# Altium PCB PCB1.PcbDoc (part 9 of 12)
Units mm, origin at the board's own origin, x right, y up, seen from the top; angles counter-clockwise.
Board outline 122.17 x 121.67 mm, 2 copper layers (Top Layer, Bottom Layer); 274 components, 225 nets, 941 pads, 421 vias.
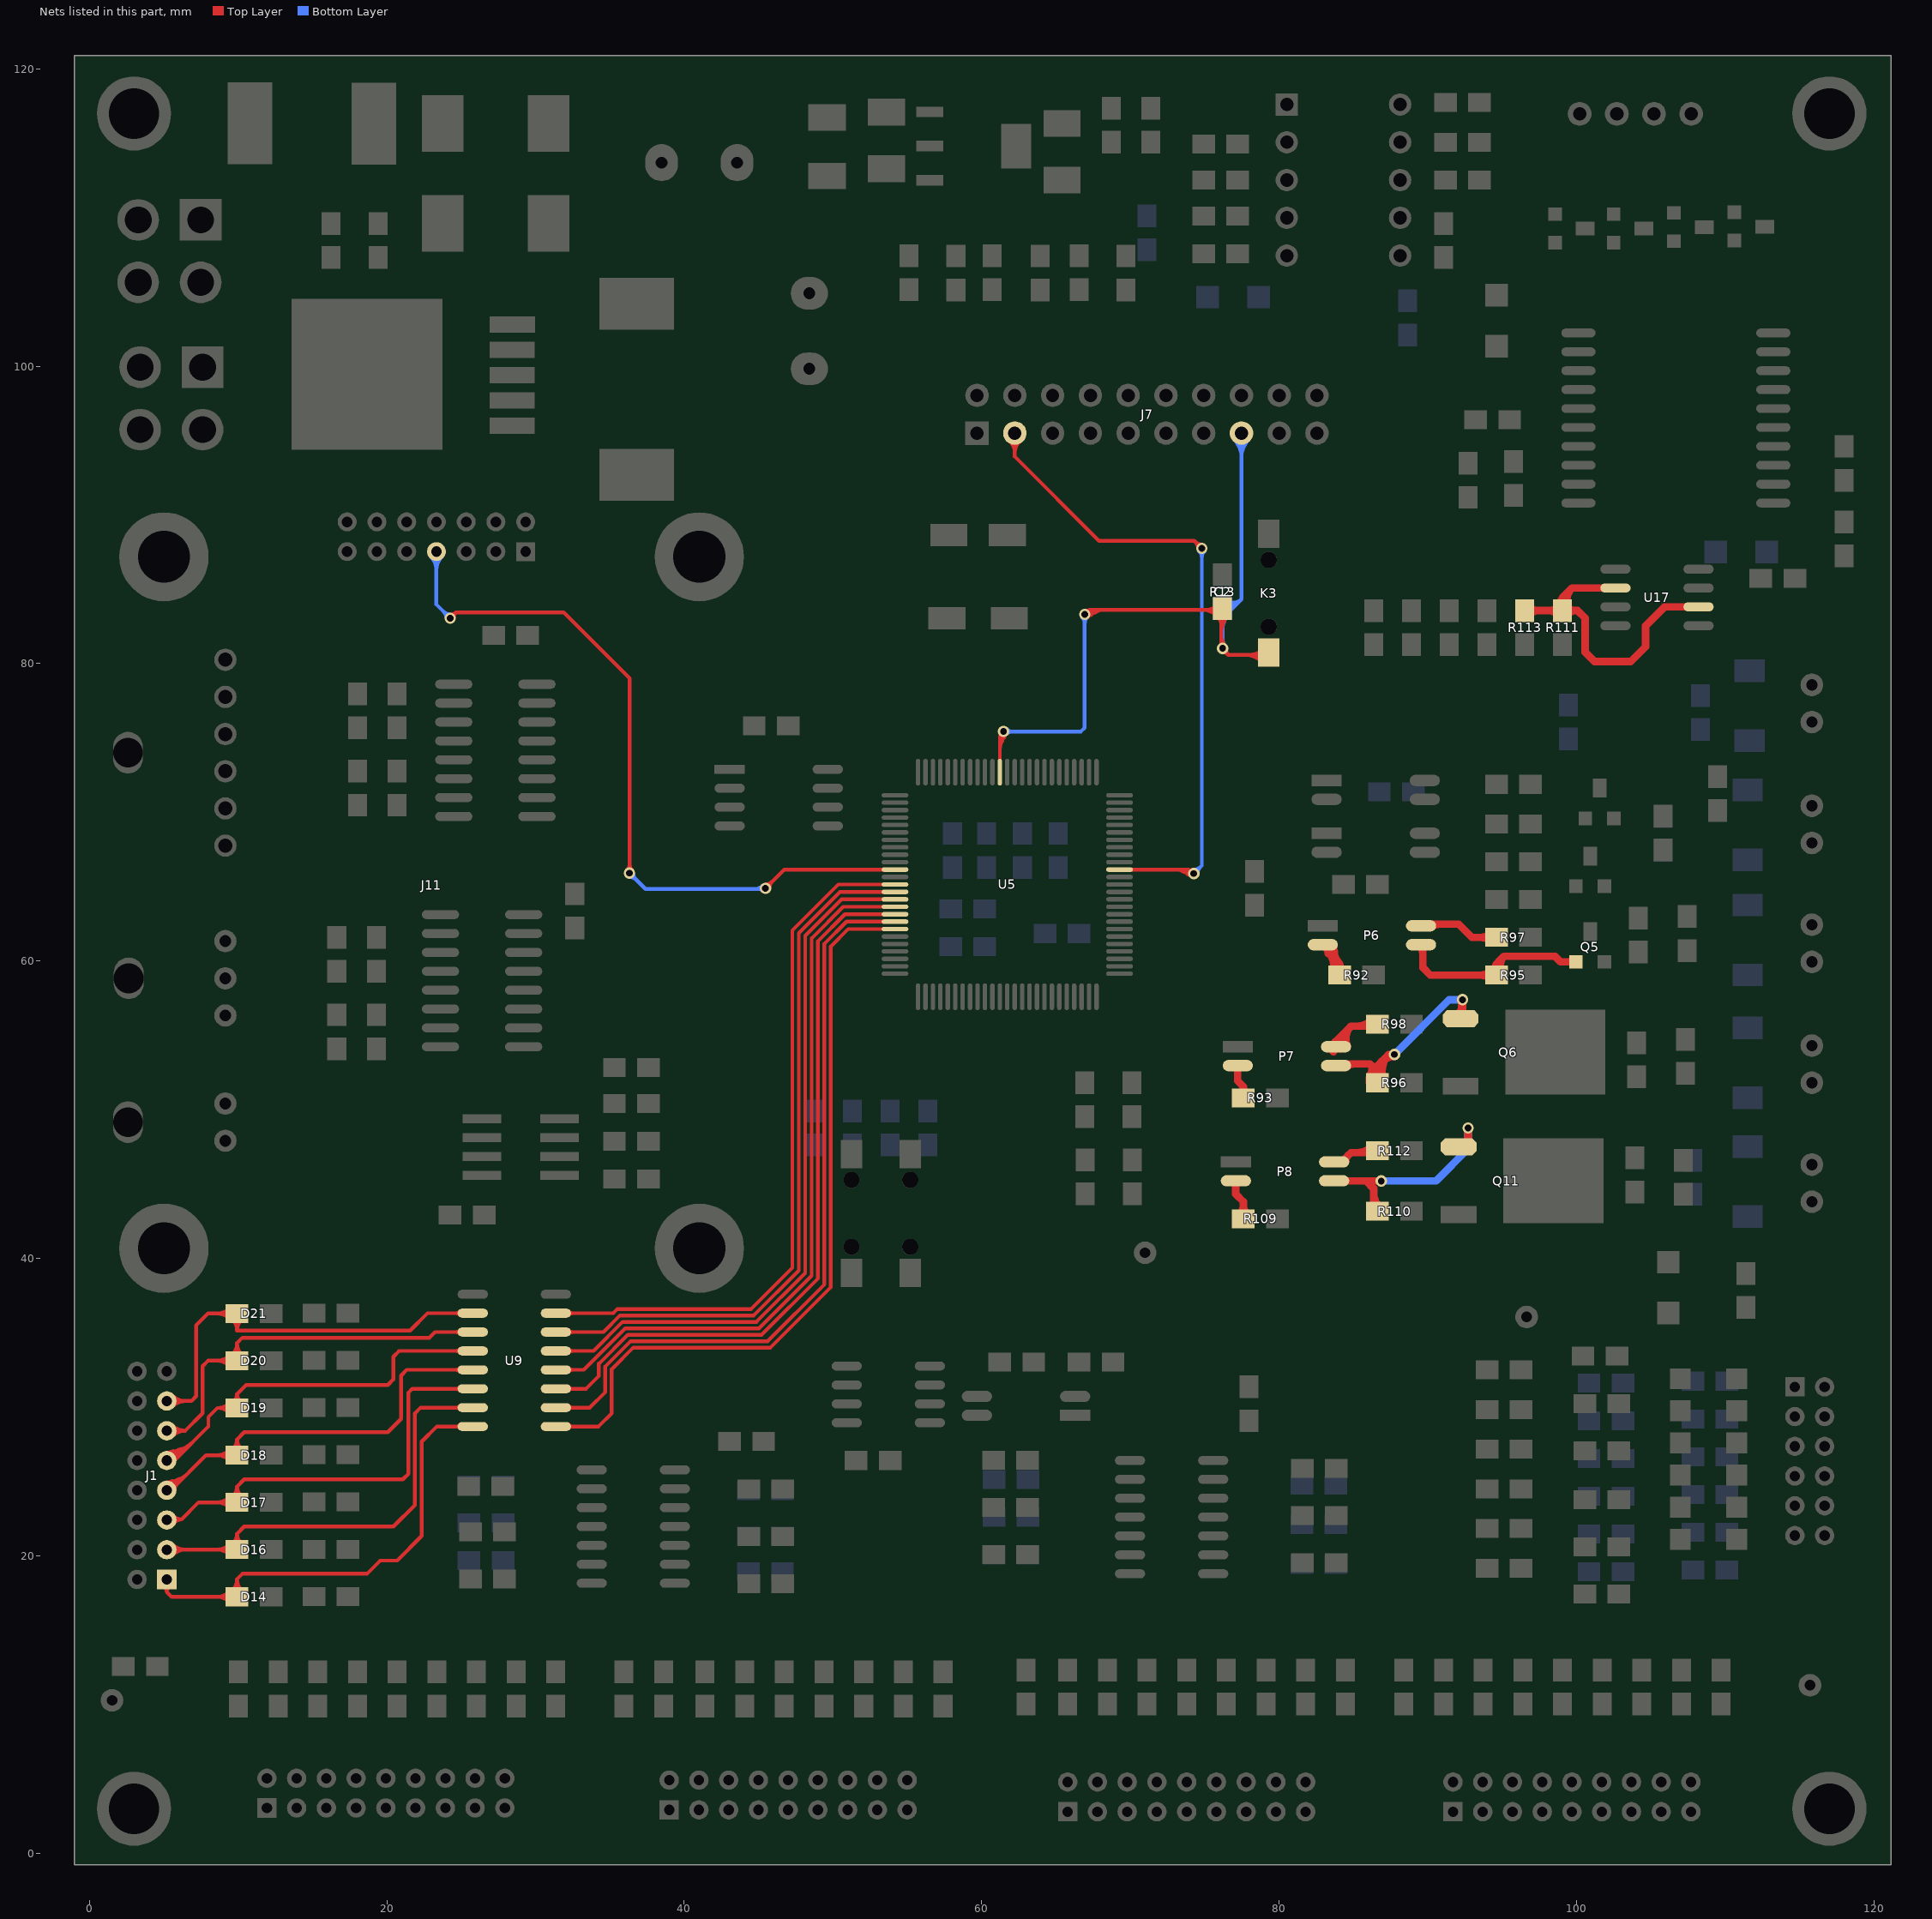
[diagram p9: the nets of this part, all layers, seen from the top]

## Via types
v1: diameter 0.762, hole 0.457, Top Layer to Bottom Layer, 339 vias
v2: diameter 1.27, hole 0.457, Top Layer to Bottom Layer, 39 vias
v3: diameter 0.889, hole 0.457, Top Layer to Bottom Layer, 21 vias
v4: diameter 1.27, hole 0.711, Top Layer to Bottom Layer, 12 vias
v5: diameter 1.524, hole 0.711, Top Layer to Bottom Layer, 5 vias
v6: diameter 1.016, hole 0.457, Top Layer to Bottom Layer, 3 vias
v7: diameter 0.711, hole 0.457, Top Layer to Bottom Layer, 1 vias
v8: diameter 1.524, hole 0.457, Top Layer to Bottom Layer, 1 vias

## Nets (pads, with @x,y where several pads share a name; then routed paths per layer and width w, separated by ;. In a path a pad name is that pad's centre, name@x,y a point inside that pad or via, vN(x,y) a via of type N, cw(c..) or ccw(c..) an arc to the next point about the centre after c; other vN are vias at no path point) (continued)
NetP6_2: P6.2 R92.1 | length 35.9
  Top Layer w0.508: P6.2@83.312,61.214 83.312,60.579 ; R92.1@84.074,59.055 84.074,59.817 ; P6.2@83.201,61.175 ccw(c83.946,61.021) 83.408,60.483 ; P6.2@83.201,61.175 ccw(c83.946,61.021) 83.408,60.483 ; P6.2@83.201,61.175 ccw(c83.946,61.021) 83.408,60.483 ; P6.2@83.201,61.175 ccw(c83.946,61.021) 83.408,60.483 ; 83.312,60.517 cw(c83.814,60.517) P6.2@83.622,60.98 ; 83.312,60.517 cw(c83.814,60.517) P6.2@83.622,60.98 ; 83.312,60.517 cw(c83.814,60.517) P6.2@83.622,60.98 ; 83.312,60.517 cw(c83.814,60.517) P6.2@83.622,60.98 ; 83.312,60.579 cw(c82.408,59.675) R92.1@83.594,59.197 ; 83.312,60.579 cw(c82.408,59.675) R92.1@83.594,59.197 ; 83.312,60.579 cw(c82.408,59.675) R92.1@83.594,59.197 ; 83.312,60.579 cw(c82.408,59.675) R92.1@83.594,59.197 ; 83.312,60.579 84.074,59.817 ; 83.331,60.589 cw(c83.966,60.419) P6.2@83.638,60.988 ; 83.331,60.589 cw(c83.966,60.419) P6.2@83.638,60.988 ; 83.331,60.589 cw(c83.966,60.419) P6.2@83.638,60.988 ; 83.331,60.589 cw(c83.966,60.419) P6.2@83.638,60.988 ; 83.331,60.589 cw(c83.966,60.419) P6.2@83.638,60.988 ; 83.331,60.589 cw(c83.966,60.419) P6.2@83.638,60.988 ; P6.2@83.406,60.717 ccw(c83.009,60.946) P6.2@83.451,61.065 ; P6.2@83.406,60.717 ccw(c83.009,60.946) P6.2@83.451,61.065 ; P6.2@83.406,60.717 ccw(c83.009,60.946) P6.2@83.451,61.065 ; P6.2@83.406,60.717 ccw(c83.009,60.946) P6.2@83.451,61.065 ; P6.2@83.49,61.003 cw(c83.007,60.461) 83.731,60.503 ; P6.2@83.49,61.003 cw(c83.007,60.461) 83.731,60.503 ; P6.2@83.49,61.003 cw(c83.007,60.461) 83.731,60.503 ; P6.2@83.49,61.003 cw(c83.007,60.461) 83.731,60.503 ; P6.2@83.49,61.003 cw(c83.007,60.461) 83.731,60.503 ; P6.2@83.49,61.003 cw(c83.007,60.461) 83.731,60.503 ; P6.2@83.698,61.072 ccw(c85.05,60.793) 84.074,59.817 ; P6.2@83.698,61.072 ccw(c85.05,60.793) 84.074,59.817 ; P6.2@83.698,61.072 ccw(c85.05,60.793) 84.074,59.817 ; P6.2@83.698,61.072 ccw(c85.05,60.793) 84.074,59.817 ; R92.1@83.845,59.36 ccw(c83.503,59.817) 84.074,59.817 ; R92.1@83.845,59.36 ccw(c83.503,59.817) 84.074,59.817 ; R92.1@83.845,59.36 ccw(c83.503,59.817) 84.074,59.817 ; R92.1@83.845,59.36 ccw(c83.503,59.817) 84.074,59.817 ; 83.855,60.036 cw(c83.183,59.363) R92.1@84.065,59.008 ; 83.855,60.036 cw(c83.183,59.363) R92.1@84.065,59.008 ; 83.855,60.036 cw(c83.183,59.363) R92.1@84.065,59.008 ; 83.855,60.036 cw(c83.183,59.363) R92.1@84.065,59.008 ; 84.074,59.817 ccw(c84.645,59.817) R92.1@84.303,59.36 ; 84.074,59.817 ccw(c84.645,59.817) R92.1@84.303,59.36 ; 84.074,59.817 ccw(c84.645,59.817) R92.1@84.303,59.36 ; 84.074,59.817 ccw(c84.645,59.817) R92.1@84.303,59.36
NetP6_3: P6.3 Q5.1 R95.1 | length 38.4
  Top Layer w0.508: P6.3@89.662,61.214 89.662,59.563 90.17,59.055 R95.1@94.615,59.055 ; R95.1@94.742,59.055 94.742,59.944 ; Q5.1@99.961,59.948 98.929,59.948 98.552,60.325 95.123,60.325 ; P6.3@89.453,61.008 cw(c88.949,60.504) 89.662,60.504 ; P6.3@89.453,61.008 cw(c88.949,60.504) 89.662,60.504 ; P6.3@89.453,61.008 cw(c88.949,60.504) 89.662,60.504 ; P6.3@89.453,61.008 cw(c88.949,60.504) 89.662,60.504 ; 93.568,59.055 cw(c93.568,58.135) R95.1@94.219,58.786 ; 93.568,59.055 ccw(c93.568,59.975) R95.1@94.219,59.324 ; 93.568,59.055 cw(c93.568,58.135) R95.1@94.219,58.786 ; 93.568,59.055 ccw(c93.568,59.975) R95.1@94.219,59.324 ; 93.568,59.055 cw(c93.568,58.135) R95.1@94.219,58.786 ; 93.568,59.055 ccw(c93.568,59.975) R95.1@94.219,59.324 ; 93.568,59.055 cw(c93.568,58.135) R95.1@94.219,58.786 ; 93.568,59.055 ccw(c93.568,59.975) R95.1@94.219,59.324 ; R95.1@94.479,59.331 ccw(c93.895,59.944) 94.742,59.944 ; R95.1@94.479,59.331 ccw(c93.895,59.944) 94.742,59.944 ; R95.1@94.479,59.331 ccw(c93.895,59.944) 94.742,59.944 ; R95.1@94.479,59.331 ccw(c93.895,59.944) 94.742,59.944 ; R95.1@94.64,58.979 cw(c95.212,59.405) 94.708,59.91 ; R95.1@94.64,58.979 cw(c95.212,59.405) 94.708,59.91 ; R95.1@94.64,58.979 cw(c95.212,59.405) 94.708,59.91 ; R95.1@94.64,58.979 cw(c95.212,59.405) 94.708,59.91 ; 94.742,59.944 ccw(c95.589,59.944) R95.1@95.005,59.331 ; 94.742,59.944 ccw(c95.589,59.944) R95.1@95.005,59.331 ; 94.742,59.944 ccw(c95.589,59.944) R95.1@95.005,59.331 ; 94.742,59.944 ccw(c95.589,59.944) R95.1@95.005,59.331 ; 94.742,59.944 95.123,60.325 ; R95.1@95.047,59.283 cw(c95.688,59.76) 95.123,60.325 ; R95.1@95.047,59.283 cw(c95.688,59.76) 95.123,60.325 ; R95.1@95.047,59.283 cw(c95.688,59.76) 95.123,60.325 ; R95.1@95.047,59.283 cw(c95.688,59.76) 95.123,60.325 ; 99.471,59.948 cw(c99.471,59.457) Q5.1@99.818,59.804 ; 99.471,59.948 ccw(c99.471,60.438) Q5.1@99.818,60.091 ; 99.471,59.948 cw(c99.471,59.457) Q5.1@99.818,59.804 ; 99.471,59.948 ccw(c99.471,60.438) Q5.1@99.818,60.091 ; 99.471,59.948 cw(c99.471,59.457) Q5.1@99.818,59.804 ; 99.471,59.948 ccw(c99.471,60.438) Q5.1@99.818,60.091 ; 99.471,59.948 cw(c99.471,59.457) Q5.1@99.818,59.804 ; 99.471,59.948 ccw(c99.471,60.438) Q5.1@99.818,60.091
NetP6_4: P6.4 R97.1 | length 13.3
  Top Layer w0.508: P6.4@89.662,62.484 92.075,62.484 92.964,61.595 R97.1@94.615,61.595 ; P6.4@90.268,62.278 cw(c90.765,61.781) 90.765,62.484 ; P6.4@90.268,62.278 cw(c90.765,61.781) 90.765,62.484 ; P6.4@90.268,62.278 cw(c90.765,61.781) 90.765,62.484 ; P6.4@90.268,62.278 cw(c90.765,61.781) 90.765,62.484 ; 93.568,61.595 cw(c93.568,60.675) R97.1@94.219,61.326 ; 93.568,61.595 ccw(c93.568,62.515) R97.1@94.219,61.864 ; 93.568,61.595 cw(c93.568,60.675) R97.1@94.219,61.326 ; 93.568,61.595 ccw(c93.568,62.515) R97.1@94.219,61.864 ; 93.568,61.595 cw(c93.568,60.675) R97.1@94.219,61.326 ; 93.568,61.595 ccw(c93.568,62.515) R97.1@94.219,61.864 ; 93.568,61.595 cw(c93.568,60.675) R97.1@94.219,61.326 ; 93.568,61.595 ccw(c93.568,62.515) R97.1@94.219,61.864
NetP7_2: P7.2 R93.1 | length 6.7
  Top Layer w0.508: P7.2@77.216,53.086 77.216,51.943 77.597,51.562 ; R93.1@77.597,50.8 77.597,51.562 ; R93.1@77.368,51.105 ccw(c77.026,51.562) 77.597,51.562 ; R93.1@77.368,51.105 ccw(c77.026,51.562) 77.597,51.562 ; R93.1@77.368,51.105 ccw(c77.026,51.562) 77.597,51.562 ; R93.1@77.368,51.105 ccw(c77.026,51.562) 77.597,51.562 ; 77.597,51.562 ccw(c78.168,51.562) R93.1@77.826,51.105 ; 77.597,51.562 ccw(c78.168,51.562) R93.1@77.826,51.105 ; 77.597,51.562 ccw(c78.168,51.562) R93.1@77.826,51.105 ; 77.597,51.562 ccw(c78.168,51.562) R93.1@77.826,51.105
NetP7_3: P7.3 Q6.1 R96.1 | length 58.9
  Top Layer w0.508: P7.3@83.566,53.086 86.106,53.086 86.233,52.959 ; R96.1@86.233,51.943 86.233,52.578 ; v1(87.757,53.721) v1@87.376,53.721 ; Q6.1@91.987,56.359 ccw(c91.162,57.184) v1@92.329,57.184 ; v1(92.329,57.404) 92.329,56.502 Q6.1@92.683,56.148 ; P7.3@84.553,52.88 cw(c85.05,52.383) 85.05,53.086 ; P7.3@84.553,52.88 cw(c85.05,52.383) 85.05,53.086 ; P7.3@84.553,52.88 cw(c85.05,52.383) 85.05,53.086 ; P7.3@84.553,52.88 cw(c85.05,52.383) 85.05,53.086 ; R96.1@86.17,51.538 cw(c87.093,51.987) 86.367,52.712 ; R96.1@86.17,51.538 cw(c87.093,51.987) 86.367,52.712 ; R96.1@86.17,51.538 cw(c87.093,51.987) 86.367,52.712 ; R96.1@86.17,51.538 cw(c87.093,51.987) 86.367,52.712 ; 86.233,52.578 ccw(c86.627,52.578) R96.1@86.556,52.191 ; 86.233,52.578 ccw(c86.627,52.578) R96.1@86.556,52.191 ; 86.233,52.578 ccw(c86.627,52.578) R96.1@86.556,52.191 ; 86.233,52.578 ccw(c86.627,52.578) R96.1@86.556,52.191 ; 86.233,52.578 ccw(c86.627,52.578) R96.1@86.556,52.191 ; 86.233,52.578 ccw(c86.627,52.578) R96.1@86.556,52.191 ; 86.233,52.578 ccw(c86.627,52.578) R96.1@86.556,52.191 ; 86.233,52.578 ccw(c86.627,52.578) R96.1@86.556,52.191 ; 86.233,52.578 86.233,52.959 ; 86.233,52.578 v1@87.376,53.721 ; 86.233,52.959 ccw(c87.198,52.959) R96.1@86.688,52.139 ; 86.233,52.959 ccw(c87.198,52.959) R96.1@86.688,52.139 ; 86.233,52.959 ccw(c87.198,52.959) R96.1@86.688,52.139 ; 86.233,52.959 ccw(c87.198,52.959) R96.1@86.688,52.139 ; R96.1@86.627,51.76 cw(c87.771,52.317) 86.872,53.217 ; R96.1@86.627,51.76 cw(c87.771,52.317) 86.872,53.217 ; R96.1@86.627,51.76 cw(c87.771,52.317) 86.872,53.217 ; R96.1@86.627,51.76 cw(c87.771,52.317) 86.872,53.217 ; 86.89,53.235 cw(c87.757,52.368) v1@87.757,53.594 ; 86.89,53.235 cw(c87.757,52.368) v1@87.757,53.594 ; 86.89,53.235 cw(c87.757,52.368) v1@87.757,53.594 ; 86.89,53.235 cw(c87.757,52.368) v1@87.757,53.594 ; R96.1@87.084,51.983 cw(c88.45,52.647) 87.376,53.721 ; R96.1@87.084,51.983 cw(c88.45,52.647) 87.376,53.721 ; R96.1@87.084,51.983 cw(c88.45,52.647) 87.376,53.721 ; R96.1@87.084,51.983 cw(c88.45,52.647) 87.376,53.721 ; 87.207,53.446 ccw(c87.019,54.147) v1@87.647,53.784 ; 87.207,53.446 ccw(c87.019,54.147) v1@87.647,53.784 ; 87.207,53.446 ccw(c87.019,54.147) v1@87.647,53.784 ; 87.207,53.446 ccw(c87.019,54.147) v1@87.647,53.784 ; 87.207,53.446 ccw(c87.019,54.147) v1@87.647,53.784 ; 87.207,53.446 ccw(c87.019,54.147) v1@87.647,53.784 ; 87.381,53.519 cw(c87.616,53.284) v1@87.718,53.6 ; 87.381,53.519 cw(c87.616,53.284) v1@87.718,53.6 ; 87.381,53.519 cw(c87.616,53.284) v1@87.718,53.6 ; 87.381,53.519 cw(c87.616,53.284) v1@87.718,53.6 ; Q6.1@91.977,56.359 ccw(c91.129,57.207) v1@92.329,57.207 ; Q6.1@91.977,56.359 ccw(c91.129,57.207) v1@92.329,57.207 ; Q6.1@91.977,56.359 ccw(c91.129,57.207) v1@92.329,57.207 ; v1@92.219,57.341 cw(c91.803,57.1) 92.267,56.976 ; v1@92.219,57.341 cw(c91.803,57.1) 92.267,56.976 ; v1@92.219,57.341 cw(c91.803,57.1) 92.267,56.976 ; v1@92.219,57.34 cw(c91.785,57.09) 92.269,56.96 ; v1@92.219,57.341 cw(c91.803,57.1) 92.267,56.976 ; v1@92.219,57.341 cw(c91.803,57.1) 92.267,56.976 ; v1@92.219,57.34 cw(c91.785,57.09) 92.269,56.96 ; v1@92.219,57.341 cw(c91.803,57.1) 92.267,56.976 ; v1@92.219,57.34 cw(c91.785,57.09) 92.269,56.96 ; v1@92.219,57.34 cw(c91.785,57.09) 92.269,56.96
  Bottom Layer w0.508: v1(87.757,53.721) 91.44,57.404 v1(92.329,57.404)
NetP7_4: P7.4 R98.1 | length 20.5
  Top Layer w0.508: P7.4@83.566,54.356 84.836,55.626 ; R98.1@86.233,55.626 84.836,55.626 ; P7.4@83.646,53.888 cw(c84.211,54.132) P7.4@83.776,54.566 ; P7.4@83.646,53.888 cw(c84.211,54.132) P7.4@83.776,54.566 ; P7.4@83.646,53.888 cw(c84.211,54.132) P7.4@83.776,54.566 ; P7.4@83.646,53.888 cw(c84.211,54.132) P7.4@83.776,54.566 ; P7.4@84.113,54.089 cw(c84.952,54.45) 84.306,55.096 ; P7.4@84.113,54.089 cw(c84.952,54.45) 84.306,55.096 ; P7.4@84.113,54.089 cw(c84.952,54.45) 84.306,55.096 ; P7.4@84.113,54.089 cw(c84.952,54.45) 84.306,55.096 ; P7.4@84.58,54.29 cw(c85.693,54.769) 84.836,55.626 ; P7.4@84.58,54.29 cw(c85.693,54.769) 84.836,55.626 ; P7.4@84.58,54.29 cw(c85.693,54.769) 84.836,55.626 ; P7.4@84.58,54.29 cw(c85.693,54.769) 84.836,55.626 ; 85.261,55.626 ccw(c85.261,56.979) R98.1@86.218,56.022 ; 85.261,55.626 ccw(c85.261,56.979) R98.1@86.218,56.022 ; 85.261,55.626 ccw(c85.261,56.979) R98.1@86.218,56.022 ; 85.261,55.626 ccw(c85.261,56.979) R98.1@86.218,56.022
NetP8_2: P8.2 R109.1 | length 8.5
  Top Layer w0.508: P8.2@77.089,45.212 77.089,44.323 77.597,43.815 R109.1@77.597,42.672 ; R109.1@77.328,42.941 ccw(c76.677,43.592) 77.597,43.592 ; R109.1@77.328,42.941 ccw(c76.677,43.592) 77.597,43.592 ; R109.1@77.328,42.941 ccw(c76.677,43.592) 77.597,43.592 ; R109.1@77.328,42.941 ccw(c76.677,43.592) 77.597,43.592 ; 77.597,43.592 ccw(c78.517,43.592) R109.1@77.866,42.941 ; 77.597,43.592 ccw(c78.517,43.592) R109.1@77.866,42.941 ; 77.597,43.592 ccw(c78.517,43.592) R109.1@77.866,42.941 ; 77.597,43.592 ccw(c78.517,43.592) R109.1@77.866,42.941
NetP8_3: P8.3 Q11.1 R110.1 | length 24.1
  Top Layer w0.508: P8.3@83.439,45.212 85.852,45.212 ; R110.1@86.36,43.18 86.36,44.704 85.852,45.212 ; v1(86.868,45.212) 85.852,45.212 ; Q11.1@92.495,47.723 ccw(c91.976,48.241) 92.71,48.241 ; Q11.1@92.683,47.512 92.71,47.539 v1(92.71,48.768) ; 92.71,48.288 ccw(c93.509,48.288) Q11.1@92.944,47.723 ; 86.36,44.406 ccw(c87.713,44.406) R110.1@86.756,43.449 ; 86.36,44.406 ccw(c87.713,44.406) R110.1@86.756,43.449 ; 86.36,44.406 ccw(c87.713,44.406) R110.1@86.756,43.449 ; 86.36,44.406 ccw(c87.713,44.406) R110.1@86.756,43.449 ; Q11.1@92.485,47.723 ccw(c91.943,48.265) 92.71,48.265 ; Q11.1@92.485,47.723 ccw(c91.943,48.265) 92.71,48.265 ; Q11.1@92.485,47.723 ccw(c91.943,48.265) 92.71,48.265 ; 92.71,48.265 ccw(c93.477,48.265) Q11.1@92.935,47.723 ; 92.71,48.265 ccw(c93.477,48.265) Q11.1@92.935,47.723 ; 92.71,48.265 ccw(c93.477,48.265) Q11.1@92.935,47.723
  Bottom Layer w0.508: v1(86.868,45.212) 90.551,45.212 92.71,47.371 v1(92.71,48.768)
NetP8_4: P8.4 R112.1 | length 9.2
  Top Layer w0.508: P8.4@83.439,46.482 84.201,46.482 84.836,47.117 R112.1@86.233,47.117 ; P8.4@84.463,46.493 cw(c85.069,46.493) 84.641,46.922 ; P8.4@84.463,46.493 cw(c85.069,46.493) 84.641,46.922 ; P8.4@84.463,46.493 cw(c85.069,46.493) 84.641,46.922 ; P8.4@84.463,46.493 cw(c85.069,46.493) 84.641,46.922 ; 85.261,47.117 ccw(c85.261,48.47) R112.1@86.218,47.513 ; 85.261,47.117 ccw(c85.261,48.47) R112.1@86.218,47.513 ; 85.261,47.117 ccw(c85.261,48.47) R112.1@86.218,47.513 ; 85.261,47.117 ccw(c85.261,48.47) R112.1@86.218,47.513
NetR111_1: R111.1 R113.2 U17.2 U17.6 | length 52.3
  Top Layer w0.508: R113.2@96.52,83.566 R111.1@99.06,83.566 ; U17.2@102.616,85.09 99.695,85.09 ; U17.6@108.204,83.82 105.918,83.82 104.648,82.55 104.648,81.153 103.632,80.137 101.219,80.137 100.584,80.772 100.584,83.058 100.076,83.566 R111.1@99.06,83.566 ; R113.2@96.789,83.297 cw(c97.44,82.646) 97.44,83.566 ; R113.2@96.789,83.297 cw(c97.44,82.646) 97.44,83.566 ; R113.2@96.789,83.297 cw(c97.44,82.646) 97.44,83.566 ; R113.2@96.789,83.297 cw(c97.44,82.646) 97.44,83.566 ; R113.2@96.789,83.835 ccw(c97.44,84.486) 97.44,83.566 ; R113.2@96.789,83.835 ccw(c97.44,84.486) 97.44,83.566 ; R113.2@96.789,83.835 ccw(c97.44,84.486) 97.44,83.566 ; R113.2@96.789,83.835 ccw(c97.44,84.486) 97.44,83.566 ; 98.14,83.566 cw(c98.14,82.646) R111.1@98.791,83.297 ; 98.14,83.566 ccw(c98.14,84.486) R111.1@98.791,83.835 ; 98.14,83.566 cw(c98.14,82.646) R111.1@98.791,83.297 ; 98.14,83.566 ccw(c98.14,84.486) R111.1@98.791,83.835 ; 98.14,83.566 cw(c98.14,82.646) R111.1@98.791,83.297 ; 98.14,83.566 ccw(c98.14,84.486) R111.1@98.791,83.835 ; 98.14,83.566 cw(c98.14,82.646) R111.1@98.791,83.297 ; 98.14,83.566 ccw(c98.14,84.486) R111.1@98.791,83.835 ; R111.1@98.831,83.998 ccw(c98.489,84.455) 99.06,84.455 ; R111.1@98.831,83.998 ccw(c98.489,84.455) 99.06,84.455 ; R111.1@98.831,83.998 ccw(c98.489,84.455) 99.06,84.455 ; R111.1@98.831,83.998 ccw(c98.489,84.455) 99.06,84.455 ; R111.1@98.941,83.649 cw(c99.725,83.938) 99.134,84.529 ; R111.1@98.941,83.649 cw(c99.725,83.938) 99.134,84.529 ; R111.1@98.941,83.649 cw(c99.725,83.938) 99.134,84.529 ; R111.1@98.941,83.649 cw(c99.725,83.938) 99.134,84.529 ; R111.1@99.06,83.566 99.06,84.455 ; 99.06,84.455 ccw(c99.631,84.455) R111.1@99.289,83.998 ; 99.06,84.455 ccw(c99.631,84.455) R111.1@99.289,83.998 ; 99.06,84.455 ccw(c99.631,84.455) R111.1@99.289,83.998 ; 99.06,84.455 ccw(c99.631,84.455) R111.1@99.289,83.998 ; 99.06,84.455 99.695,85.09 ; R111.1@99.329,83.297 cw(c99.98,82.646) 99.98,83.566 ; R111.1@99.329,83.297 cw(c99.98,82.646) 99.98,83.566 ; R111.1@99.329,83.297 cw(c99.98,82.646) 99.98,83.566 ; R111.1@99.329,83.297 cw(c99.98,82.646) 99.98,83.566 ; R111.1@99.329,83.835 ccw(c99.98,84.486) 99.98,83.566 ; R111.1@99.329,83.835 ccw(c99.98,84.486) 99.98,83.566 ; R111.1@99.329,83.835 ccw(c99.98,84.486) 99.98,83.566 ; R111.1@99.329,83.835 ccw(c99.98,84.486) 99.98,83.566 ; R111.1@99.417,83.825 cw(c100.544,84.241) 99.695,85.09 ; R111.1@99.417,83.825 cw(c100.544,84.241) 99.695,85.09 ; R111.1@99.417,83.825 cw(c100.544,84.241) 99.695,85.09 ; R111.1@99.417,83.825 cw(c100.544,84.241) 99.695,85.09
NSRST: C2.2 J7.15 K3.2 R13.1 U5.14 | length 141.4
  Top Layer w0.254: U5.14@61.222,72.701 61.222,75.065 ; v1@76.124,81.051 76.124,83.617 67.234,83.617 ; v1@76.175,81.001 76.581,80.594 ; K3.2@79.306,80.751 79.149,80.594 76.581,80.594 ; 61.222,74.231 cw(c62.675,74.231) v1@61.648,75.258 ; 61.222,74.231 cw(c62.675,74.231) v1@61.648,75.258 ; 61.222,74.231 cw(c62.675,74.231) v1@61.648,75.258 ; 61.222,74.844 cw(c62.062,74.844) v1(61.468,75.438) ; 61.222,74.844 cw(c62.062,74.844) v1(61.468,75.438) ; 61.222,74.844 cw(c62.062,74.844) v1(61.468,75.438) ; 61.222,75.065 ccw(c61.083,75.204) v1@61.251,75.306 ; 61.222,75.065 ccw(c61.083,75.204) v1@61.251,75.306 ; 61.222,75.065 ccw(c61.083,75.204) v1@61.251,75.306 ; 61.222,75.065 61.468,75.311 v1(61.468,75.438) ; v1@61.249,75.309 cw(c61.038,75.184) 61.251,75.061 ; v1@61.249,75.309 cw(c61.038,75.184) 61.251,75.061 ; v1@61.249,75.309 cw(c61.038,75.184) 61.251,75.061 ; 61.251,75.061 cw(c61.463,74.939) v1@61.465,75.184 ; 61.251,75.061 cw(c61.463,74.939) v1@61.465,75.184 ; 61.251,75.061 cw(c61.463,74.939) v1@61.465,75.184 ; 61.251,75.094 cw(c61.468,74.877) v1@61.468,75.184 ; 61.251,75.094 cw(c61.468,74.877) v1@61.468,75.184 ; 61.251,75.094 cw(c61.468,74.877) v1@61.468,75.184 ; v1@61.282,75.265 cw(c60.95,74.956) 61.342,74.73 ; v1@61.282,75.265 cw(c60.95,74.956) 61.342,74.73 ; v1@61.282,75.265 cw(c60.95,74.956) 61.342,74.73 ; v1(61.468,75.438) cw(c61.213,75.201) 61.514,75.028 ; v1(61.468,75.438) cw(c61.213,75.201) 61.514,75.028 ; v1(61.468,75.438) cw(c61.213,75.201) 61.514,75.028 ; v1(66.929,83.312) cw(c67.665,82.576) 67.665,83.617 ; v1(66.929,83.312) ccw(c67.173,83.657) 67.384,83.291 ; v1(66.929,83.312) ccw(c67.173,83.657) 67.384,83.291 ; v1(66.929,83.312) cw(c67.665,82.576) 67.665,83.617 ; v1(66.929,83.312) ccw(c67.173,83.657) 67.384,83.291 ; v1(66.929,83.312) cw(c67.665,82.576) 67.665,83.617 ; v1(66.929,83.312) 67.234,83.617 ; v1@66.999,83.556 ccw(c67.065,83.786) 67.234,83.617 ; v1@66.999,83.556 ccw(c67.065,83.786) 67.234,83.617 ; v1@66.999,83.556 ccw(c67.065,83.786) 67.234,83.617 ; v1@67.018,83.55 ccw(c67.173,83.966) 67.395,83.581 ; v1@67.018,83.55 ccw(c67.173,83.966) 67.395,83.581 ; v1@67.018,83.55 ccw(c67.173,83.966) 67.395,83.581 ; v1@67.076,83.519 ccw(c67.425,84.014) 67.727,83.49 ; v1@67.076,83.519 ccw(c67.425,84.014) 67.727,83.49 ; v1@67.076,83.519 ccw(c67.425,84.014) 67.727,83.49 ; v1@67.109,83.132 cw(c68.278,81.963) 68.278,83.617 ; v1@67.109,83.132 cw(c68.278,81.963) 68.278,83.617 ; v1@67.109,83.132 cw(c68.278,81.963) 68.278,83.617 ; v1@67.173,83.382 cw(c67.403,83.448) 67.234,83.617 ; v1@67.173,83.382 cw(c67.403,83.448) 67.234,83.617 ; v1@67.173,83.382 cw(c67.403,83.448) 67.234,83.617 ; v1@67.18,83.27 cw(c67.618,83.197) 67.395,83.581 ; v1@67.18,83.27 cw(c67.618,83.197) 67.395,83.581 ; v1@67.18,83.27 cw(c67.618,83.197) 67.395,83.581 ; 74.851,83.617 cw(c74.851,82.217) R13.1@75.841,83.207 ; 74.851,83.617 cw(c74.851,82.217) R13.1@75.841,83.207 ; 74.851,83.617 cw(c74.851,82.217) R13.1@75.841,83.207 ; 75.096,83.617 ccw(c75.096,84.67) R13.1@75.841,83.925 ; 75.096,83.617 ccw(c75.096,84.67) R13.1@75.841,83.925 ; 75.096,83.617 ccw(c75.096,84.67) R13.1@75.841,83.925 ; 75.464,83.617 cw(c75.464,82.83) R13.1@76.02,83.386 ; 75.464,83.617 cw(c75.464,82.83) R13.1@76.02,83.386 ; 75.464,83.617 cw(c75.464,82.83) R13.1@76.02,83.386 ; R13.1@75.841,83.207 cw(c75.158,82.524) 76.124,82.524 ; R13.1@75.841,83.207 cw(c75.158,82.524) 76.124,82.524 ; R13.1@75.841,83.207 cw(c75.158,82.524) 76.124,82.524 ; v1@76.02,81.206 ccw(c75.771,81.455) 76.124,81.455 ; v1@76.02,81.206 ccw(c75.771,81.455) 76.124,81.455 ; v1@76.02,81.206 ccw(c75.771,81.455) 76.124,81.455 ; 76.124,81.823 ccw(c76.997,81.823) v1@76.38,81.206 ; 76.124,81.823 ccw(c76.997,81.823) v1@76.38,81.206 ; 76.124,81.823 ccw(c76.997,81.823) v1@76.38,81.206 ; 76.124,82.156 cw(c77.61,82.156) R13.1@76.559,83.207 ; 76.124,82.156 cw(c77.61,82.156) R13.1@76.559,83.207 ; 76.124,82.156 cw(c77.61,82.156) R13.1@76.559,83.207 ; 76.124,82.769 cw(c76.997,82.769) R13.1@76.38,83.386 ; 76.124,82.769 cw(c76.997,82.769) R13.1@76.38,83.386 ; 76.124,82.769 cw(c76.997,82.769) R13.1@76.38,83.386 ; v1@76.2,80.772 cw(c76.2,80.281) 76.547,80.628 ; v1@76.2,80.772 cw(c76.2,80.281) 76.547,80.628 ; v1@76.2,80.772 cw(c76.2,80.281) 76.547,80.628 ; v1(76.2,81.026) ccw(c76.592,81.076) 76.49,80.694 ; v1(76.2,81.026) ccw(c76.592,81.076) 76.49,80.694 ; v1(76.2,81.026) ccw(c76.592,81.076) 76.49,80.694 ; v1@76.451,80.988 ccw(c76.907,80.92) 76.581,80.594 ; v1@76.451,80.988 ccw(c76.907,80.92) 76.581,80.594 ; v1@76.451,80.988 ccw(c76.907,80.92) 76.581,80.594 ; 77.698,80.594 cw(c77.698,78.913) K3.2@78.887,80.102 ; 77.698,80.594 cw(c77.698,78.913) K3.2@78.887,80.102 ; 77.698,80.594 cw(c77.698,78.913) K3.2@78.887,80.102 ; 78.051,80.594 ccw(c78.051,81.776) K3.2@78.887,80.94 ; 78.051,80.594 ccw(c78.051,81.776) K3.2@78.887,80.94 ; 78.051,80.594 ccw(c78.051,81.776) K3.2@78.887,80.94 ; 78.311,80.594 cw(c78.311,79.526) K3.2@79.066,80.281 ; 78.311,80.594 cw(c78.311,79.526) K3.2@79.066,80.281 ; 78.311,80.594 cw(c78.311,79.526) K3.2@79.066,80.281
  Bottom Layer w0.254: v1(61.468,75.438) 66.675,75.438 66.929,75.692 v1(66.929,83.312) ; v1(76.2,81.026) C2.2@76.2,83.693 76.835,83.693 77.47,84.328 ; J7.15@77.47,95.504 77.47,84.328 ; v1@61.648,75.258 cw(c62.081,74.825) 62.081,75.438 ; v1@61.648,75.258 cw(c62.081,74.825) 62.081,75.438 ; v1@61.648,75.258 cw(c62.081,74.825) 62.081,75.438 ; v1@61.648,75.618 ccw(c62.081,76.051) 62.081,75.438 ; v1@61.648,75.618 ccw(c62.081,76.051) 62.081,75.438 ; v1@61.648,75.618 ccw(c62.081,76.051) 62.081,75.438 ; v1@66.749,83.132 cw(c66.316,82.699) 66.929,82.699 ; v1@66.749,83.132 cw(c66.316,82.699) 66.929,82.699 ; v1@66.749,83.132 cw(c66.316,82.699) 66.929,82.699 ; 66.929,82.699 cw(c67.542,82.699) v1@67.109,83.132 ; 66.929,82.699 cw(c67.542,82.699) v1@67.109,83.132 ; 66.929,82.699 cw(c67.542,82.699) v1@67.109,83.132 ; C2.2@75.841,83.207 cw(c74.974,82.34) 76.2,82.34 ; C2.2@75.841,83.207 cw(c74.974,82.34) 76.2,82.34 ; C2.2@75.841,83.207 cw(c74.974,82.34) 76.2,82.34 ; v1@76.02,81.206 ccw(c75.587,81.639) 76.2,81.639 ; v1@76.02,81.206 ccw(c75.587,81.639) 76.2,81.639 ; v1@76.02,81.206 ccw(c75.587,81.639) 76.2,81.639 ; C2.2@76.056,83.611 ccw(c76.397,84.106) C2.2@76.823,83.681 ; C2.2@76.056,83.611 ccw(c76.397,84.106) C2.2@76.823,83.681 ; C2.2@76.056,83.611 ccw(c76.397,84.106) C2.2@76.823,83.681 ; 76.2,81.639 ccw(c76.813,81.639) v1@76.38,81.206 ; 76.2,81.639 ccw(c76.813,81.639) v1@76.38,81.206 ; 76.2,81.639 ccw(c76.813,81.639) v1@76.38,81.206 ; 76.2,82.34 cw(c77.426,82.34) C2.2@76.559,83.207 ; 76.2,82.34 cw(c77.426,82.34) C2.2@76.559,83.207 ; 76.2,82.34 cw(c77.426,82.34) C2.2@76.559,83.207 ; C2.2@76.2,83.82 ccw(c76.573,84.362) 77.039,83.897 ; C2.2@76.2,83.82 ccw(c76.573,84.362) 77.039,83.897 ; C2.2@76.2,83.82 ccw(c76.573,84.362) 77.039,83.897 ; C2.2@76.344,84.029 ccw(c76.749,84.617) 77.254,84.112 ; C2.2@76.344,84.029 ccw(c76.749,84.617) 77.254,84.112 ; C2.2@76.344,84.029 ccw(c76.749,84.617) 77.254,84.112 ; C2.2@76.488,84.238 ccw(c76.925,84.873) 77.47,84.328 ; C2.2@76.488,84.238 ccw(c76.925,84.873) 77.47,84.328 ; C2.2@76.488,84.238 ccw(c76.925,84.873) 77.47,84.328 ; J7.15@77.003,95.037 cw(c75.876,93.91) 77.47,93.91 ; J7.15@77.003,95.037 cw(c75.876,93.91) 77.47,93.91 ; J7.15@77.003,95.037 cw(c75.876,93.91) 77.47,93.91 ; J7.15@77.183,95.217 cw(c76.489,94.523) 77.47,94.523 ; J7.15@77.183,95.217 cw(c76.489,94.523) 77.47,94.523 ; J7.15@77.183,95.217 cw(c76.489,94.523) 77.47,94.523 ; 77.47,93.91 cw(c79.064,93.91) J7.15@77.937,95.037 ; 77.47,93.91 cw(c79.064,93.91) J7.15@77.937,95.037 ; 77.47,93.91 cw(c79.064,93.91) J7.15@77.937,95.037 ; 77.47,94.523 cw(c78.451,94.523) J7.15@77.757,95.217 ; 77.47,94.523 cw(c78.451,94.523) J7.15@77.757,95.217 ; 77.47,94.523 cw(c78.451,94.523) J7.15@77.757,95.217
NTRST: J7.3 U5.90 | length 81
  Top Layer w0.254: J7.3@61.851,94.963 cw(c61.339,94.234) 62.23,94.234 cw(c63.121,94.234) J7.3@62.609,94.963 ; J7.3@62.23,95.504 62.23,94.513 ; 62.302,94.584 62.23,94.513 ; U5.90@69.272,66.151 73.93,66.151 ; J7.3@61.976,94.895 cw(c61.816,94.513) 62.23,94.513 ; J7.3@61.976,94.895 cw(c61.816,94.513) 62.23,94.513 ; J7.3@61.976,94.895 cw(c61.816,94.513) 62.23,94.513 ; 62.23,94.513 cw(c62.644,94.513) J7.3@62.484,94.895 ; 62.23,94.513 cw(c62.644,94.513) J7.3@62.484,94.895 ; 62.23,94.513 cw(c62.644,94.513) J7.3@62.484,94.895 ; 62.23,94.513 62.23,93.923 67.888,88.265 74.295,88.265 v1(74.803,87.757) ; 73.011,66.151 cw(c73.011,64.629) v1@74.087,65.705 ; 73.011,66.151 cw(c73.011,64.629) v1@74.087,65.705 ; 73.011,66.151 cw(c73.011,64.629) v1@74.087,65.705 ; 73.011,66.151 cw(c73.011,64.629) v1@74.087,65.705 ; 73.527,66.028 ccw(c73.779,66.464) v1@74.103,66.079 ; 73.527,66.028 ccw(c73.779,66.464) v1@74.103,66.079 ; 73.527,66.028 ccw(c73.779,66.464) v1@74.103,66.079 ; 73.527,66.028 ccw(c73.779,66.464) v1@74.103,66.079 ; 73.527,66.028 ccw(c73.779,66.464) v1@74.103,66.079 ; 73.527,66.028 ccw(c73.779,66.464) v1@74.103,66.079 ; 73.624,66.151 cw(c73.624,65.242) v1(74.267,65.885) ; 73.624,66.151 cw(c73.624,65.242) v1(74.267,65.885) ; 73.624,66.151 cw(c73.624,65.242) v1(74.267,65.885) ; 73.624,66.151 cw(c73.624,65.242) v1(74.267,65.885) ; 73.841,65.847 ccw(c74.027,66.169) v1(74.267,65.885) ; 73.841,65.847 ccw(c74.027,66.169) v1(74.267,65.885) ; 73.841,65.847 ccw(c74.027,66.169) v1(74.267,65.885) ; 73.841,65.847 ccw(c74.027,66.169) v1(74.267,65.885) ; 73.841,65.847 ccw(c74.027,66.169) v1(74.267,65.885) ; 73.841,65.847 ccw(c74.027,66.169) v1(74.267,65.885) ; 73.859,66.12 cw(c73.705,65.853) v1@74.013,65.87 ; 73.859,66.12 ccw(c74.014,66.387) v1@74.153,66.112 ; 73.859,66.12 cw(c73.705,65.853) v1@74.013,65.87 ; 73.859,66.12 ccw(c74.014,66.387) v1@74.153,66.112 ; 73.859,66.12 cw(c73.705,65.853) v1@74.013,65.87 ; 73.859,66.12 ccw(c74.014,66.387) v1@74.153,66.112 ; 73.859,66.12 cw(c73.705,65.853) v1@74.013,65.87 ; 73.859,66.12 ccw(c74.014,66.387) v1@74.153,66.112 ; 73.859,66.12 cw(c73.705,65.853) v1@74.013,65.87 ; 73.859,66.12 ccw(c74.014,66.387) v1@74.153,66.112 ; 73.859,66.12 cw(c73.705,65.853) v1@74.013,65.87 ; 73.859,66.12 ccw(c74.014,66.387) v1@74.153,66.112 ; 73.93,66.151 cw(c73.723,65.944) v1@74.014,65.912 ; 73.93,66.151 ccw(c74.069,66.29) v1@74.156,66.113 ; 73.93,66.151 cw(c73.723,65.944) v1@74.014,65.912 ; 73.93,66.151 ccw(c74.069,66.29) v1@74.156,66.113 ; 73.93,66.151 cw(c73.723,65.944) v1@74.014,65.912 ; 73.93,66.151 ccw(c74.069,66.29) v1@74.156,66.113 ; 73.93,66.151 cw(c73.723,65.944) v1@74.014,65.912 ; 73.93,66.151 ccw(c74.069,66.29) v1@74.156,66.113 ; 73.93,66.151 74.196,65.885 v1(74.267,65.885) ; 74.369,88.191 cw(c73.936,87.757) v1@74.549,87.757 ; 74.369,88.191 ccw(c74.803,88.624) v1@74.803,88.011 ; 74.369,88.191 cw(c73.936,87.757) v1@74.549,87.757 ; 74.369,88.191 ccw(c74.803,88.624) v1@74.803,88.011 ; 74.369,88.191 cw(c73.936,87.757) v1@74.549,87.757 ; 74.369,88.191 ccw(c74.803,88.624) v1@74.803,88.011 ; 74.463,88.077 ccw(c74.892,88.192) v1(74.803,87.757) ; 74.463,88.077 ccw(c74.892,88.192) v1(74.803,87.757) ; 74.463,88.077 ccw(c74.892,88.192) v1(74.803,87.757) ; 74.483,88.097 cw(c74.368,87.668) v1(74.803,87.757) ; 74.483,88.097 cw(c74.368,87.668) v1(74.803,87.757) ; 74.483,88.097 cw(c74.368,87.668) v1(74.803,87.757)
  Bottom Layer w0.254: v1(74.267,65.885) 74.803,66.421 v1(74.803,87.757) ; v1@74.267,66.139 ccw(c74.267,66.752) 74.7,66.318 ; v1@74.267,66.139 ccw(c74.267,66.752) 74.7,66.318 ; v1@74.267,66.139 ccw(c74.267,66.752) 74.7,66.318 ; v1@74.267,66.139 ccw(c74.267,66.752) 74.7,66.318 ; v1@74.521,65.885 cw(c75.134,65.885) 74.7,66.318 ; v1@74.521,65.885 cw(c75.134,65.885) 74.7,66.318 ; v1@74.521,65.885 cw(c75.134,65.885) 74.7,66.318 ; v1@74.521,65.885 cw(c75.134,65.885) 74.7,66.318 ; v1@74.623,87.577 cw(c74.19,87.144) 74.803,87.144 ; v1@74.623,87.577 cw(c74.19,87.144) 74.803,87.144 ; v1@74.623,87.577 cw(c74.19,87.144) 74.803,87.144 ; 74.803,87.144 cw(c75.416,87.144) v1@74.983,87.577 ; 74.803,87.144 cw(c75.416,87.144) v1@74.983,87.577 ; 74.803,87.144 cw(c75.416,87.144) v1@74.983,87.577
OUT1: U5.44 U9.1 | length 53.8
  Top Layer w0.254: U9.1@31.369,28.702 34.239,28.702 35.128,29.591 35.128,32.564 36.575,34.011 45.795,34.011 49.86,38.076 49.86,60.988 51.024,62.151 U5.44@54.172,62.151 ; U9.1@32.206,28.576 cw(c32.509,28.273) 32.509,28.702 ; U9.1@32.206,28.576 cw(c32.509,28.273) 32.509,28.702 ; U9.1@32.206,28.576 cw(c32.509,28.273) 32.509,28.702 ; U9.1@32.206,28.828 ccw(c32.509,29.131) 32.509,28.702 ; U9.1@32.206,28.828 ccw(c32.509,29.131) 32.509,28.702 ; U9.1@32.206,28.828 ccw(c32.509,29.131) 32.509,28.702
OUT2: U5.43 U9.2 | length 52.8
  Top Layer w0.254: U9.2@31.369,29.972 33.655,29.972 34.696,31.013 34.696,32.743 36.396,34.442 45.616,34.442 49.428,38.255 49.428,61.166 50.913,62.651 U5.43@54.172,62.651 ; U9.2@32.206,29.846 cw(c32.509,29.543) 32.509,29.972 ; U9.2@32.206,29.846 cw(c32.509,29.543) 32.509,29.972 ; U9.2@32.206,29.846 cw(c32.509,29.543) 32.509,29.972 ; U9.2@32.206,30.098 ccw(c32.509,30.401) 32.509,29.972 ; U9.2@32.206,30.098 ccw(c32.509,30.401) 32.509,29.972 ; U9.2@32.206,30.098 ccw(c32.509,30.401) 32.509,29.972
OUT3: U5.42 U9.3 | length 51.8
  Top Layer w0.254: U9.3@31.369,31.242 33.401,31.242 34.265,32.106 34.265,32.922 36.217,34.874 45.212,34.874 48.997,38.659 48.997,61.345 50.802,63.151 U5.42@54.172,63.151 ; U9.3@32.206,31.116 cw(c32.509,30.813) 32.509,31.242 ; U9.3@32.206,31.116 cw(c32.509,30.813) 32.509,31.242 ; U9.3@32.206,31.116 cw(c32.509,30.813) 32.509,31.242 ; U9.3@32.206,31.368 ccw(c32.509,31.671) 32.509,31.242 ; U9.3@32.206,31.368 ccw(c32.509,31.671) 32.509,31.242 ; U9.3@32.206,31.368 ccw(c32.509,31.671) 32.509,31.242
OUT4: U5.41 U9.4 | length 50.3
  Top Layer w0.254: U9.4@31.369,32.512 33.244,32.512 36.038,35.306 45.033,35.306 48.565,38.838 48.565,61.524 50.692,63.651 U5.41@54.172,63.651 ; 32.509,32.512 cw(c32.509,32.941) 32.206,32.638 ccw(c32.509,32.941) 32.509,32.512 ; 32.509,32.512 ccw(c32.509,32.083) 32.206,32.386 cw(c32.509,32.083) 32.509,32.512
OUT5: U5.40 U9.5 | length 50.7
  Top Layer w0.254: U9.5@31.369,33.782 33.904,33.782 35.86,35.738 44.854,35.738 48.133,39.017 48.133,61.703 50.581,64.151 U5.40@54.172,64.151 ; U9.5@32.206,33.656 cw(c32.509,33.353) 32.509,33.782 ; U9.5@32.206,33.656 cw(c32.509,33.353) 32.509,33.782 ; U9.5@32.206,33.656 cw(c32.509,33.353) 32.509,33.782 ; U9.5@32.206,33.908 ccw(c32.509,34.211) 32.509,33.782 ; U9.5@32.206,33.908 ccw(c32.509,34.211) 32.509,33.782 ; U9.5@32.206,33.908 ccw(c32.509,34.211) 32.509,33.782
OUT6: U5.39 U9.6 | length 50.4
  Top Layer w0.254: U9.6@31.369,35.052 34.563,35.052 35.681,36.17 44.675,36.17 47.701,39.195 47.701,61.882 50.47,64.651 U5.39@54.172,64.651 ; U9.6@32.206,34.926 cw(c32.509,34.623) 32.509,35.052 ; U9.6@32.206,34.926 cw(c32.509,34.623) 32.509,35.052 ; U9.6@32.206,34.926 cw(c32.509,34.623) 32.509,35.052 ; U9.6@32.206,35.178 ccw(c32.509,35.481) 32.509,35.052 ; U9.6@32.206,35.178 ccw(c32.509,35.481) 32.509,35.052 ; U9.6@32.206,35.178 ccw(c32.509,35.481) 32.509,35.052
OUT7: U5.38 U9.7 | length 49.4
  Top Layer w0.254: U9.7@31.369,36.322 35.222,36.322 35.502,36.601 44.497,36.601 47.269,39.374 47.269,62.061 50.36,65.151 U5.38@54.172,65.151 ; 32.509,36.322 cw(c32.509,36.751) 32.206,36.448 ccw(c32.509,36.751) 32.509,36.322 ; 32.509,36.322 ccw(c32.509,35.893) 32.206,36.196 cw(c32.509,35.893) 32.509,36.322
OUT_1: D14.2 J1.1 U9.16 | length 47
  Top Layer w0.254: J1.1@5.207,18.415 5.207,17.57 ; D14.2@9.826,17.145 D14.2@9.93,17.249 ; U9.16@25.781,28.702 23.368,28.702 22.352,27.686 22.352,21.336 20.701,19.685 19.558,19.685 18.669,18.796 10.287,18.796 9.93,18.439 ; J1.1@4.974,17.947 cw(c4.787,17.57) 5.207,17.57 ; J1.1@4.974,17.947 cw(c4.787,17.57) 5.207,17.57 ; J1.1@4.974,17.947 cw(c4.787,17.57) 5.207,17.57 ; 5.207,17.57 cw(c5.627,17.57) J1.1@5.44,17.947 ; 5.207,17.57 cw(c5.627,17.57) J1.1@5.44,17.947 ; 5.207,17.57 cw(c5.627,17.57) J1.1@5.44,17.947 ; 5.207,17.57 5.529,17.249 D14.2@9.93,17.249 ; 8.576,17.249 cw(c8.576,16.022) D14.2@9.443,16.89 ; 8.576,17.249 ccw(c8.576,18.475) D14.2@9.443,17.608 ; 8.576,17.249 cw(c8.576,16.022) D14.2@9.443,16.89 ; 8.576,17.249 ccw(c8.576,18.475) D14.2@9.443,17.608 ; 8.576,17.249 cw(c8.576,16.022) D14.2@9.443,16.89 ; 8.576,17.249 ccw(c8.576,18.475) D14.2@9.443,17.608 ; D14.2@9.578,17.616 ccw(c8.79,18.439) 9.93,18.439 ; D14.2@9.578,17.616 ccw(c8.79,18.439) 9.93,18.439 ; D14.2@9.578,17.616 ccw(c8.79,18.439) 9.93,18.439 ; D14.2@9.93,17.249 9.93,18.439 ; 9.93,18.439 ccw(c11.069,18.439) D14.2@10.281,17.616 ; 9.93,18.439 ccw(c11.069,18.439) D14.2@10.281,17.616 ; 9.93,18.439 ccw(c11.069,18.439) D14.2@10.281,17.616 ; 24.641,28.702 cw(c24.641,28.273) U9.16@24.944,28.576 ; 24.641,28.702 ccw(c24.641,29.131) U9.16@24.944,28.828 ; 24.641,28.702 cw(c24.641,28.273) U9.16@24.944,28.576 ; 24.641,28.702 ccw(c24.641,29.131) U9.16@24.944,28.828 ; 24.641,28.702 cw(c24.641,28.273) U9.16@24.944,28.576 ; 24.641,28.702 ccw(c24.641,29.131) U9.16@24.944,28.828
OUT_2: D16.2 J1.3 U9.15 | length 52.2
  Top Layer w0.254: J1.3@5.207,20.415 5.216,20.424 D16.2@9.93,20.424 9.93,21.487 ; U9.15@25.781,29.972 22.276,29.972 21.895,29.591 21.895,23.419 20.447,21.971 10.414,21.971 9.93,21.487 ; J1.3@5.397,20.225 cw(c5.878,19.744) 5.878,20.424 ; J1.3@5.397,20.225 cw(c5.878,19.744) 5.878,20.424 ; J1.3@5.397,20.225 cw(c5.878,19.744) 5.878,20.424 ; J1.3@5.577,20.045 cw(c6.491,19.131) 6.491,20.424 ; J1.3@5.577,20.045 cw(c6.491,19.131) 6.491,20.424 ; J1.3@5.577,20.045 cw(c6.491,19.131) 6.491,20.424 ; J1.3@5.577,20.785 ccw(c6.448,21.656) 6.448,20.424 ; J1.3@5.577,20.785 ccw(c6.448,21.656) 6.448,20.424 ; J1.3@5.577,20.785 ccw(c6.448,21.656) 6.448,20.424 ; 8.576,20.424 cw(c8.576,19.197) D16.2@9.443,20.065 ; 8.576,20.424 ccw(c8.576,21.65) D16.2@9.443,20.783 ; 8.576,20.424 cw(c8.576,19.197) D16.2@9.443,20.065 ; 8.576,20.424 ccw(c8.576,21.65) D16.2@9.443,20.783 ; 8.576,20.424 cw(c8.576,19.197) D16.2@9.443,20.065 ; 8.576,20.424 ccw(c8.576,21.65) D16.2@9.443,20.783 ; 8.576,20.424 cw(c8.576,19.197) D16.2@9.443,20.065 ; 8.576,20.424 ccw(c8.576,21.65) D16.2@9.443,20.783 ; D16.2@9.611,20.819 ccw(c9.072,21.487) 9.93,21.487 ; D16.2@9.611,20.819 ccw(c9.072,21.487) 9.93,21.487 ; D16.2@9.611,20.819 ccw(c9.072,21.487) 9.93,21.487 ; D16.2@9.611,20.819 ccw(c9.072,21.487) 9.93,21.487 ; 9.93,21.487 ccw(c10.787,21.487) D16.2@10.249,20.819 ; 9.93,21.487 ccw(c10.787,21.487) D16.2@10.249,20.819 ; 9.93,21.487 ccw(c10.787,21.487) D16.2@10.249,20.819 ; 9.93,21.487 ccw(c10.787,21.487) D16.2@10.249,20.819 ; 24.641,29.972 cw(c24.641,29.543) U9.15@24.944,29.846 ; 24.641,29.972 ccw(c24.641,30.401) U9.15@24.944,30.098 ; 24.641,29.972 cw(c24.641,29.543) U9.15@24.944,29.846 ; 24.641,29.972 ccw(c24.641,30.401) U9.15@24.944,30.098 ; 24.641,29.972 cw(c24.641,29.543) U9.15@24.944,29.846 ; 24.641,29.972 ccw(c24.641,30.401) U9.15@24.944,30.098
OUT_3: D17.2 J1.5 U9.14 | length 48.3
  Top Layer w0.254: J1.5@4.699,22.225 J1.5@4.991,22.225 ; J1.5@4.991,22.451 6.195,22.451 ; U9.14@25.781,31.242 21.717,31.242 21.463,30.988 21.463,25.527 21.082,25.146 10.414,25.146 9.93,24.662 ; J1.5@5.622,22.733 ccw(c6.195,23.173) 6.195,22.451 ; J1.5@5.622,22.733 ccw(c6.195,23.173) 6.195,22.451 ; J1.5@5.622,22.733 ccw(c6.195,23.173) 6.195,22.451 ; J1.5@5.655,22.146 cw(c6.195,21.821) 6.195,22.451 ; J1.5@5.655,22.146 cw(c6.195,21.821) 6.195,22.451 ; J1.5@5.655,22.146 cw(c6.195,21.821) 6.195,22.451 ; 6.195,22.451 7.343,23.599 D17.2@9.93,23.599 9.93,24.662 ; 8.576,23.599 cw(c8.576,22.372) D17.2@9.443,23.24 ; 8.576,23.599 ccw(c8.576,24.825) D17.2@9.443,23.958 ; 8.576,23.599 cw(c8.576,22.372) D17.2@9.443,23.24 ; 8.576,23.599 ccw(c8.576,24.825) D17.2@9.443,23.958 ; 8.576,23.599 cw(c8.576,22.372) D17.2@9.443,23.24 ; 8.576,23.599 ccw(c8.576,24.825) D17.2@9.443,23.958 ; 8.576,23.599 cw(c8.576,22.372) D17.2@9.443,23.24 ; 8.576,23.599 ccw(c8.576,24.825) D17.2@9.443,23.958 ; D17.2@9.611,23.994 ccw(c9.072,24.662) 9.93,24.662 ; D17.2@9.611,23.994 ccw(c9.072,24.662) 9.93,24.662 ; D17.2@9.611,23.994 ccw(c9.072,24.662) 9.93,24.662 ; D17.2@9.611,23.994 ccw(c9.072,24.662) 9.93,24.662 ; 9.93,24.662 ccw(c10.787,24.662) D17.2@10.249,23.994 ; 9.93,24.662 ccw(c10.787,24.662) D17.2@10.249,23.994 ; 9.93,24.662 ccw(c10.787,24.662) D17.2@10.249,23.994 ; 9.93,24.662 ccw(c10.787,24.662) D17.2@10.249,23.994 ; 24.641,31.242 cw(c24.641,30.813) U9.14@24.944,31.116 ; 24.641,31.242 ccw(c24.641,31.671) U9.14@24.944,31.368 ; 24.641,31.242 cw(c24.641,30.813) U9.14@24.944,31.116 ; 24.641,31.242 ccw(c24.641,31.671) U9.14@24.944,31.368 ; 24.641,31.242 cw(c24.641,30.813) U9.14@24.944,31.116 ; 24.641,31.242 ccw(c24.641,31.671) U9.14@24.944,31.368
OUT_4: D18.2 J1.7 U9.13 | length 60.7
  Top Layer w0.254: J1.7@5.207,24.415 5.492,24.415 7.851,26.774 D18.2@9.93,26.774 9.93,27.837 ; J1.7@5.426,24.89 ccw(c5.487,25.021) 5.604,24.936 ccw(c5.728,24.846) J1.7@5.61,24.748 ; U9.13@25.781,32.512 21.336,32.512 20.955,32.131 20.955,29.21 20.066,28.321 10.414,28.321 9.93,27.837 ; J1.7@4.984,24.501 cw(c5.811,24.183) 5.581,25.038 ; J1.7@4.984,24.501 cw(c5.811,24.183) 5.581,25.038 ; J1.7@4.984,24.501 cw(c5.811,24.183) 5.581,25.038 ; J1.7@5.207,24.684 ccw(c5.207,26.021) 6.153,25.076 ; J1.7@5.207,24.684 ccw(c5.207,26.021) 6.153,25.076 ; J1.7@5.207,24.684 ccw(c5.207,26.021) 6.153,25.076 ; J1.7@5.207,24.938 ccw(c5.207,26.889) 6.586,25.509 ; J1.7@5.207,24.938 ccw(c5.207,26.889) 6.586,25.509 ; J1.7@5.207,24.938 ccw(c5.207,26.889) 6.586,25.509 ; J1.7@5.221,24.41 cw(c6.387,23.961) 6.063,25.167 ; J1.7@5.221,24.41 cw(c6.387,23.961) 6.063,25.167 ; J1.7@5.221,24.41 cw(c6.387,23.961) 6.063,25.167 ; J1.7@5.468,24.868 ccw(c5.656,25.193) 5.753,24.83 ; J1.7@5.468,24.868 ccw(c5.656,25.193) 5.753,24.83 ; J1.7@5.468,24.868 ccw(c5.656,25.193) 5.753,24.83 ; J1.7@5.472,24.372 cw(c6.093,24.27) 5.931,24.878 ; J1.7@5.472,24.372 cw(c6.093,24.27) 5.931,24.878 ; J1.7@5.472,24.372 cw(c6.093,24.27) 5.931,24.878 ; J1.7@5.73,24.415 cw(c6.305,24.415) 5.898,24.821 ; J1.7@5.73,24.415 cw(c6.305,24.415) 5.898,24.821 ; J1.7@5.73,24.415 cw(c6.305,24.415) 5.898,24.821 ; 8.576,26.774 cw(c8.576,25.547) D18.2@9.443,26.415 ; 8.576,26.774 ccw(c8.576,28) D18.2@9.443,27.133 ; 8.576,26.774 cw(c8.576,25.547) D18.2@9.443,26.415 ; 8.576,26.774 ccw(c8.576,28) D18.2@9.443,27.133 ; 8.576,26.774 cw(c8.576,25.547) D18.2@9.443,26.415 ; 8.576,26.774 ccw(c8.576,28) D18.2@9.443,27.133 ; 8.576,26.774 cw(c8.576,25.547) D18.2@9.443,26.415 ; 8.576,26.774 ccw(c8.576,28) D18.2@9.443,27.133 ; D18.2@9.611,27.169 ccw(c9.072,27.837) 9.93,27.837 ; D18.2@9.611,27.169 ccw(c9.072,27.837) 9.93,27.837 ; D18.2@9.611,27.169 ccw(c9.072,27.837) 9.93,27.837 ; D18.2@9.611,27.169 ccw(c9.072,27.837) 9.93,27.837 ; 9.93,27.837 ccw(c10.787,27.837) D18.2@10.249,27.169 ; 9.93,27.837 ccw(c10.787,27.837) D18.2@10.249,27.169 ; 9.93,27.837 ccw(c10.787,27.837) D18.2@10.249,27.169 ; 9.93,27.837 ccw(c10.787,27.837) D18.2@10.249,27.169 ; 24.641,32.512 cw(c24.641,32.083) U9.13@24.944,32.386 ; 24.641,32.512 ccw(c24.641,32.941) U9.13@24.944,32.638 ; 24.641,32.512 cw(c24.641,32.083) U9.13@24.944,32.386 ; 24.641,32.512 ccw(c24.641,32.941) U9.13@24.944,32.638 ; 24.641,32.512 cw(c24.641,32.083) U9.13@24.944,32.386 ; 24.641,32.512 ccw(c24.641,32.941) U9.13@24.944,32.638
OUT_5: D19.2 J1.9 U9.12 | length 64.7
  Top Layer w0.254: J1.9@5.207,26.415 5.714,26.415 8.001,28.702 8.001,29.337 8.613,29.949 ; J1.9@5.38,26.909 ccw(c5.494,27.237) 5.754,27.005 ccw(c6.028,26.76) J1.9@5.689,26.618 ; D19.2@9.377,29.672 ccw(c8.867,29.341) 8.867,29.949 ccw(c8.867,30.557) D19.2@9.377,30.226 ; U9.12@25.781,33.782 20.828,33.782 20.447,33.401 20.447,31.877 20.066,31.496 10.541,31.496 9.93,30.885 ; J1.9@4.994,26.523 cw(c5.919,26.056) 5.651,27.057 ; J1.9@4.994,26.523 cw(c5.919,26.056) 5.651,27.057 ; J1.9@4.994,26.523 cw(c5.919,26.056) 5.651,27.057 ; J1.9@5.207,26.43 ccw(c5.207,27.69) 6.098,26.799 ; J1.9@5.207,26.43 ccw(c5.207,27.69) 6.098,26.799 ; J1.9@5.207,26.43 ccw(c5.207,27.69) 6.098,26.799 ; J1.9@5.207,26.684 ccw(c5.207,28.557) 6.532,27.233 ; J1.9@5.207,26.684 ccw(c5.207,28.557) 6.532,27.233 ; J1.9@5.207,26.684 ccw(c5.207,28.557) 6.532,27.233 ; J1.9@5.207,26.938 ccw(c5.207,29.425) 6.965,27.666 ; J1.9@5.207,26.938 ccw(c5.207,29.425) 6.965,27.666 ; J1.9@5.207,26.938 ccw(c5.207,29.425) 6.965,27.666 ; J1.9@5.22,26.408 cw(c6.598,25.713) 6.199,27.204 ; J1.9@5.22,26.408 cw(c6.598,25.713) 6.199,27.204 ; J1.9@5.22,26.408 cw(c6.598,25.713) 6.199,27.204 ; J1.9@5.46,26.325 cw(c6.358,26.006) 6.112,26.926 ; J1.9@5.46,26.325 cw(c6.358,26.006) 6.112,26.926 ; J1.9@5.46,26.325 cw(c6.358,26.006) 6.112,26.926 ; J1.9@5.468,26.868 ccw(c5.656,27.193) 5.753,26.83 ; J1.9@5.468,26.868 ccw(c5.656,27.193) 5.753,26.83 ; J1.9@5.468,26.868 ccw(c5.656,27.193) 5.753,26.83 ; J1.9@5.653,26.688 ccw(c5.813,26.787) 5.861,26.605 ; J1.9@5.653,26.688 ccw(c5.813,26.787) 5.861,26.605 ; J1.9@5.653,26.688 ccw(c5.813,26.787) 5.861,26.605 ; J1.9@5.73,26.429 cw(c5.907,26.434) 5.861,26.605 ; J1.9@5.73,26.429 cw(c5.907,26.434) 5.861,26.605 ; J1.9@5.73,26.429 cw(c5.907,26.434) 5.861,26.605 ; 8.613,29.949 cw(c8.613,28.81) D19.2@9.436,29.597 ; 8.613,29.949 ccw(c8.613,31.088) D19.2@9.436,30.3 ; 8.613,29.949 cw(c8.613,28.81) D19.2@9.436,29.597 ; 8.613,29.949 ccw(c8.613,31.088) D19.2@9.436,30.3 ; 8.613,29.949 cw(c8.613,28.81) D19.2@9.436,29.597 ; 8.613,29.949 ccw(c8.613,31.088) D19.2@9.436,30.3 ; 8.613,29.949 D19.2@9.93,29.949 9.93,30.885 ; D19.2@9.653,30.375 ccw(c9.322,30.885) 9.93,30.885 ; D19.2@9.653,30.375 ccw(c9.322,30.885) 9.93,30.885 ; D19.2@9.653,30.375 ccw(c9.322,30.885) 9.93,30.885 ; D19.2@9.653,30.375 ccw(c9.322,30.885) 9.93,30.885 ; 9.93,30.885 ccw(c10.537,30.885) D19.2@10.206,30.375 ; 9.93,30.885 ccw(c10.537,30.885) D19.2@10.206,30.375 ; 9.93,30.885 ccw(c10.537,30.885) D19.2@10.206,30.375 ; 9.93,30.885 ccw(c10.537,30.885) D19.2@10.206,30.375 ; 24.641,33.782 cw(c24.641,33.353) U9.12@24.944,33.656 ; 24.641,33.782 ccw(c24.641,34.211) U9.12@24.944,33.908 ; 24.641,33.782 cw(c24.641,33.353) U9.12@24.944,33.656 ; 24.641,33.782 ccw(c24.641,34.211) U9.12@24.944,33.908 ; 24.641,33.782 cw(c24.641,33.353) U9.12@24.944,33.656 ; 24.641,33.782 ccw(c24.641,34.211) U9.12@24.944,33.908
OUT_6: D20.2 J1.11 U9.11 | length 48.7
  Top Layer w0.254: J1.11@5.207,28.415 6.444,28.415 ; U9.11@25.781,35.052 23.241,35.052 22.86,34.671 10.287,34.671 9.93,34.314 ; J1.11@5.582,28.051 cw(c6.444,27.214) 6.444,28.415 ; J1.11@5.582,28.051 cw(c6.444,27.214) 6.444,28.415 ; J1.11@5.582,28.051 cw(c6.444,27.214) 6.444,28.415 ; J1.11@5.582,28.779 ccw(c6.444,29.616) 6.444,28.415 ; J1.11@5.582,28.779 ccw(c6.444,29.616) 6.444,28.415 ; J1.11@5.582,28.779 ccw(c6.444,29.616) 6.444,28.415 ; 6.444,28.415 7.62,29.591 7.62,32.766 7.978,33.124 D20.2@9.93,33.124 9.93,34.314 ; 8.576,33.124 cw(c8.576,31.897) D20.2@9.443,32.765 ; 8.576,33.124 ccw(c8.576,34.35) D20.2@9.443,33.483 ; 8.576,33.124 cw(c8.576,31.897) D20.2@9.443,32.765 ; 8.576,33.124 ccw(c8.576,34.35) D20.2@9.443,33.483 ; 8.576,33.124 cw(c8.576,31.897) D20.2@9.443,32.765 ; 8.576,33.124 ccw(c8.576,34.35) D20.2@9.443,33.483 ; 8.576,33.124 cw(c8.576,31.897) D20.2@9.443,32.765 ; 8.576,33.124 ccw(c8.576,34.35) D20.2@9.443,33.483 ; D20.2@9.578,33.491 ccw(c8.79,34.314) 9.93,34.314 ; D20.2@9.578,33.491 ccw(c8.79,34.314) 9.93,34.314 ; D20.2@9.578,33.491 ccw(c8.79,34.314) 9.93,34.314 ; D20.2@9.578,33.491 ccw(c8.79,34.314) 9.93,34.314 ; 9.93,34.314 ccw(c11.069,34.314) D20.2@10.281,33.491 ; 9.93,34.314 ccw(c11.069,34.314) D20.2@10.281,33.491 ; 9.93,34.314 ccw(c11.069,34.314) D20.2@10.281,33.491 ; 9.93,34.314 ccw(c11.069,34.314) D20.2@10.281,33.491 ; 24.641,35.052 cw(c24.641,34.623) U9.11@24.944,34.926 ; 24.641,35.052 ccw(c24.641,35.481) U9.11@24.944,35.178 ; 24.641,35.052 cw(c24.641,34.623) U9.11@24.944,34.926 ; 24.641,35.052 ccw(c24.641,35.481) U9.11@24.944,35.178 ; 24.641,35.052 cw(c24.641,34.623) U9.11@24.944,34.926 ; 24.641,35.052 ccw(c24.641,35.481) U9.11@24.944,35.178
OUT_7: D21.2 J1.13 U9.10 | length 45.8
  Top Layer w0.254: J1.13@5.207,30.415 6.869,30.415 7.188,30.734 7.188,35.509 7.978,36.299 D21.2@9.398,36.299 ; D21.2@9.93,36.299 9.93,35.155 ; U9.10@25.781,36.322 22.733,36.322 21.566,35.155 9.93,35.155 ; J1.13@5.577,30.045 cw(c6.47,29.152) 6.47,30.415 ; J1.13@5.577,30.045 cw(c6.47,29.152) 6.47,30.415 ; J1.13@5.577,30.045 cw(c6.47,29.152) 6.47,30.415 ; J1.13@5.577,30.785 ccw(c6.47,31.678) 6.47,30.415 ; J1.13@5.577,30.785 ccw(c6.47,31.678) 6.47,30.415 ; J1.13@5.577,30.785 ccw(c6.47,31.678) 6.47,30.415 ; 8.576,36.299 cw(c8.576,35.072) D21.2@9.443,35.94 ; 8.576,36.299 ccw(c8.576,37.525) D21.2@9.443,36.658 ; 8.576,36.299 cw(c8.576,35.072) D21.2@9.443,35.94 ; 8.576,36.299 ccw(c8.576,37.525) D21.2@9.443,36.658 ; 8.576,36.299 cw(c8.576,35.072) D21.2@9.443,35.94 ; 8.576,36.299 ccw(c8.576,37.525) D21.2@9.443,36.658 ; D21.2@9.589,35.922 cw(c8.897,35.155) 9.93,35.155 ; D21.2@9.589,35.922 cw(c8.897,35.155) 9.93,35.155 ; D21.2@9.589,35.922 cw(c8.897,35.155) 9.93,35.155 ; 9.93,35.155 cw(c10.962,35.155) D21.2@10.27,35.922 ; 9.93,35.155 cw(c10.962,35.155) D21.2@10.27,35.922 ; 9.93,35.155 cw(c10.962,35.155) D21.2@10.27,35.922 ; 24.641,36.322 cw(c24.641,35.893) U9.10@24.944,36.196 ; 24.641,36.322 ccw(c24.641,36.751) U9.10@24.944,36.448 ; 24.641,36.322 cw(c24.641,35.893) U9.10@24.944,36.196 ; 24.641,36.322 ccw(c24.641,36.751) U9.10@24.944,36.448 ; 24.641,36.322 cw(c24.641,35.893) U9.10@24.944,36.196 ; 24.641,36.322 ccw(c24.641,36.751) U9.10@24.944,36.448
RST: J11.7 U5.36 | length 66.9
  Top Layer w0.254: v1@24.257,83.312 24.511,83.312 24.638,83.439 ; v1(36.322,65.913) 36.322,79.014 31.897,83.439 24.638,83.439 ; v1@45.466,64.77 v1(45.466,64.897) ; 45.786,65.237 ccw(c45.901,64.808) v1(45.466,64.897) ; 45.806,65.217 cw(c45.377,65.332) v1(45.466,64.897) ; U5.36@54.172,66.151 46.72,66.151 v1(45.466,64.897) ; 24.638,83.439 cw(c24.324,83.753) 24.281,83.311 ccw(c24.324,83.753) 24.638,83.439 ; 24.638,83.439 ccw(c24.952,83.125) 24.51,83.082 cw(c24.952,83.125) 24.638,83.439 ; 36.322,66.526 cw(c35.709,66.526) 36.142,66.093 ccw(c35.709,66.526) 36.322,66.526 ; 36.322,66.526 ccw(c36.935,66.526) 36.502,66.093 cw(c36.935,66.526) 36.322,66.526 ; 45.9,65.331 cw(c45.466,65.764) 45.466,65.151 ccw(c45.466,65.764) 45.9,65.331 ; 45.9,65.331 ccw(c46.333,64.897) 45.72,64.897 cw(c46.333,64.897) 45.9,65.331
  Bottom Layer w0.254: J11.7@23.337,87.535 23.337,83.978 v1(24.257,83.058) ; v1(36.322,65.913) 37.389,64.846 45.415,64.846 v1(45.466,64.897) ; 23.337,86.309 cw(c24.563,86.309) 23.696,87.176 ccw(c24.563,86.309) 23.337,86.309 ; 23.337,86.309 ccw(c22.111,86.309) 22.978,87.176 cw(c22.111,86.309) 23.337,86.309 ; 23.823,83.492 cw(c23.39,83.058) 24.003,83.058 ccw(c23.39,83.058) 23.823,83.492 ; 23.823,83.492 ccw(c24.257,83.925) 24.257,83.312 cw(c24.257,83.925) 23.823,83.492 ; 36.756,65.479 cw(c37.189,65.913) 36.576,65.913 ccw(c37.189,65.913) 36.756,65.479 ; 36.756,65.479 ccw(c36.322,65.046) 36.322,65.659 cw(c36.322,65.046) 36.756,65.479 ; 44.73,64.846 ccw(c44.73,65.633) 45.286,65.077 cw(c44.73,65.633) 44.73,64.846 ; 44.975,64.846 cw(c44.975,64.406) 45.286,64.717 ccw(c44.975,64.406) 44.975,64.846